# Altium PCB FEU31_Part3.PcbDoc
Units mm, origin at the board's own origin, x right, y up, seen from the top; angles counter-clockwise.
Board outline 29.45 x 22.27 mm, 2 copper layers (Top Layer, Bottom Layer), stack 1.021 mm thick; 57 components, 50 nets, 200 pads, 80 vias.
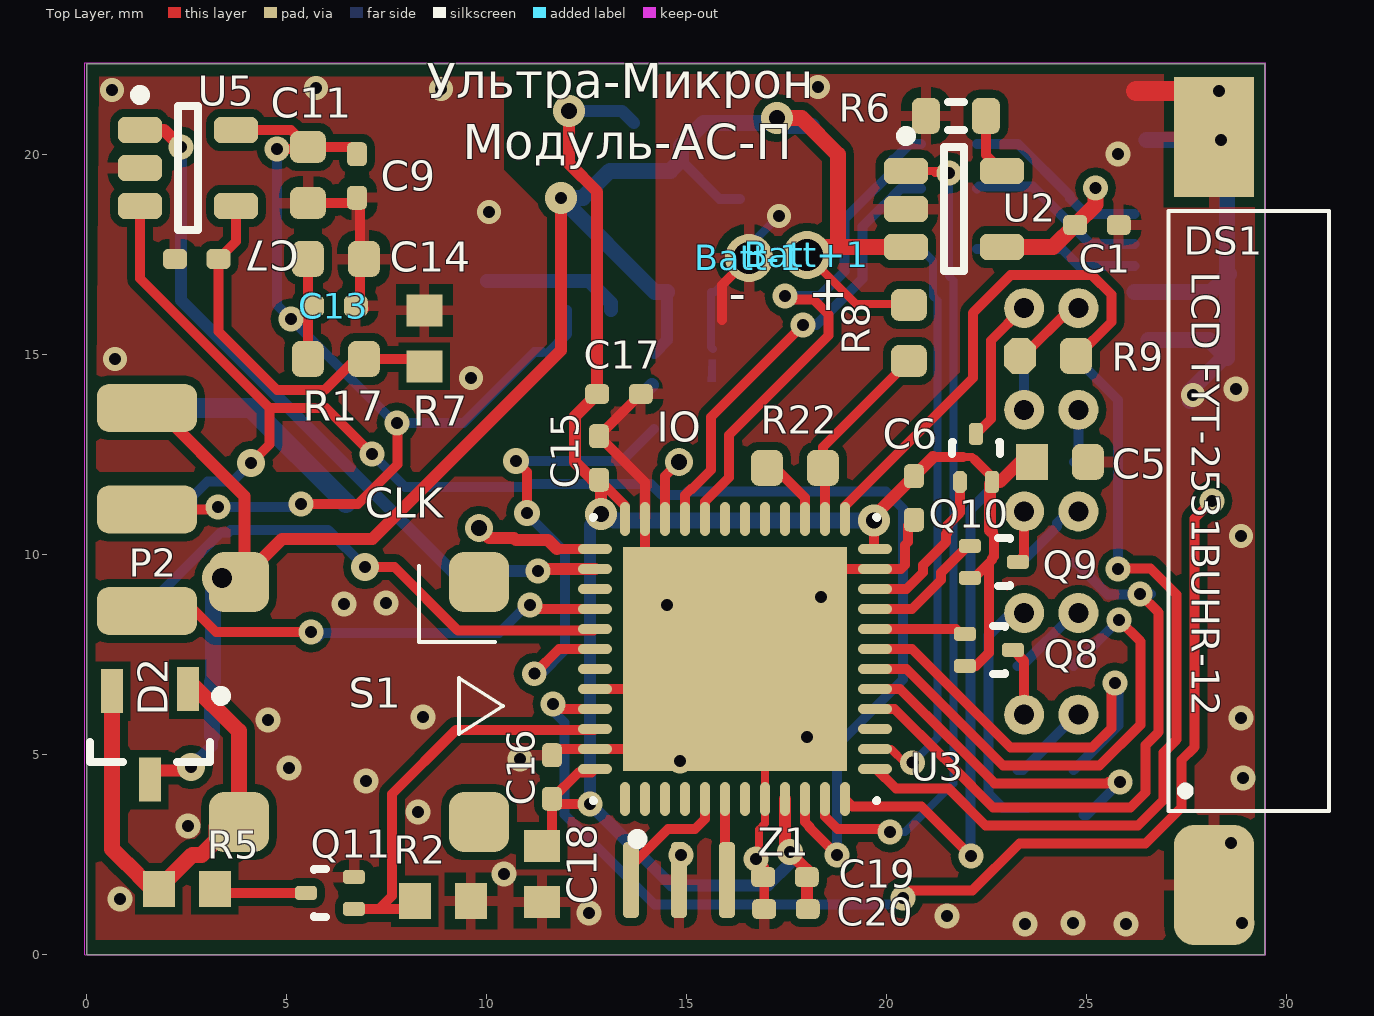
[diagram p0: Top Layer view]
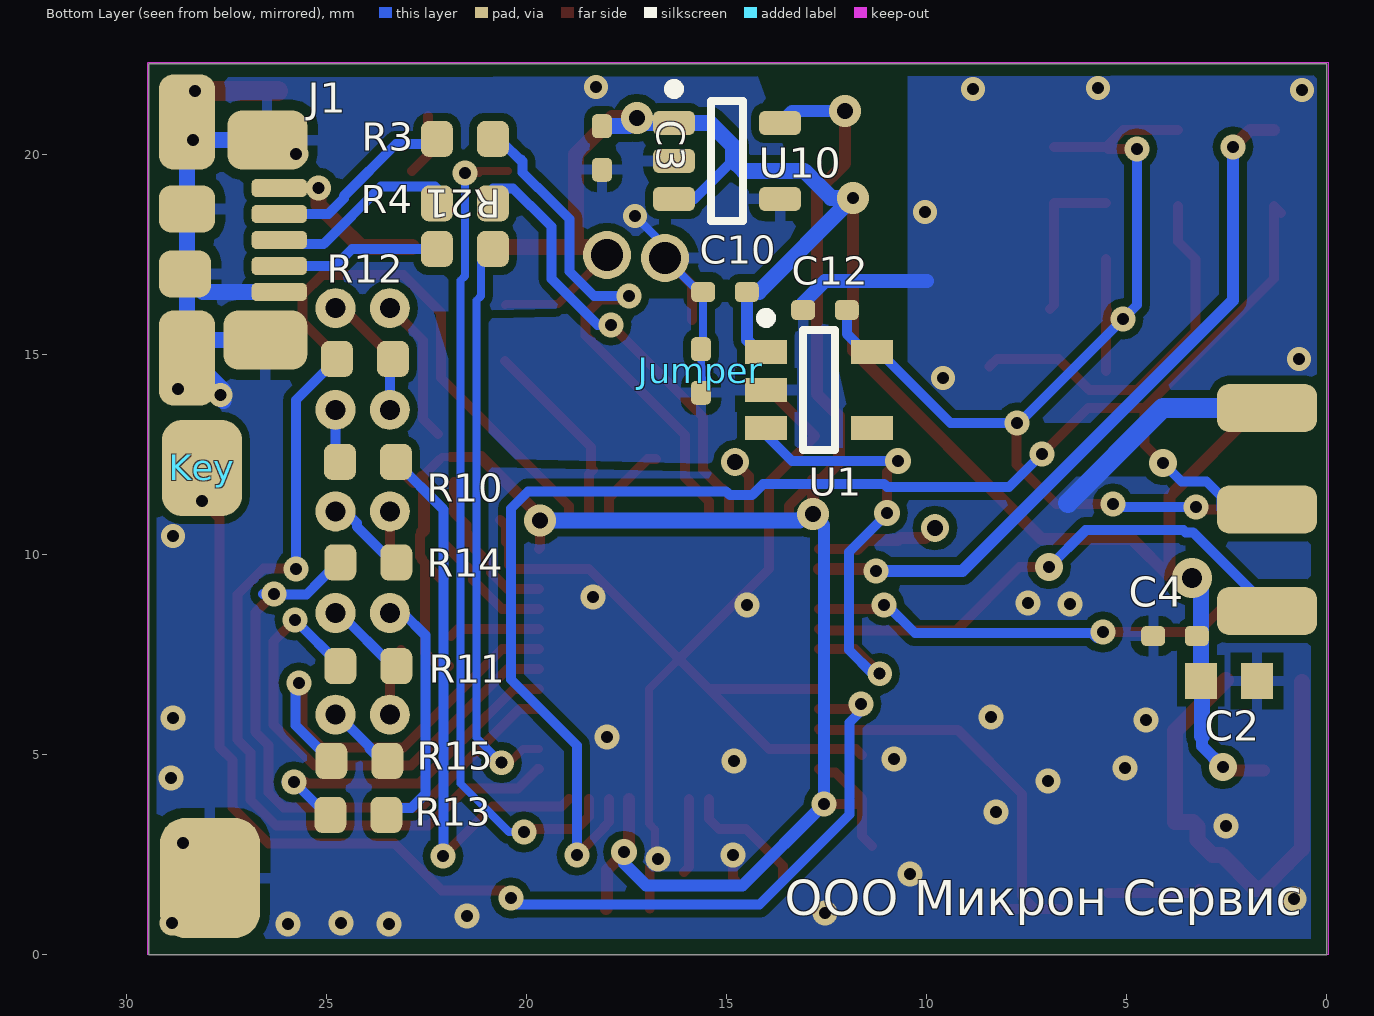
[diagram p1: Bottom Layer view, seen from below]
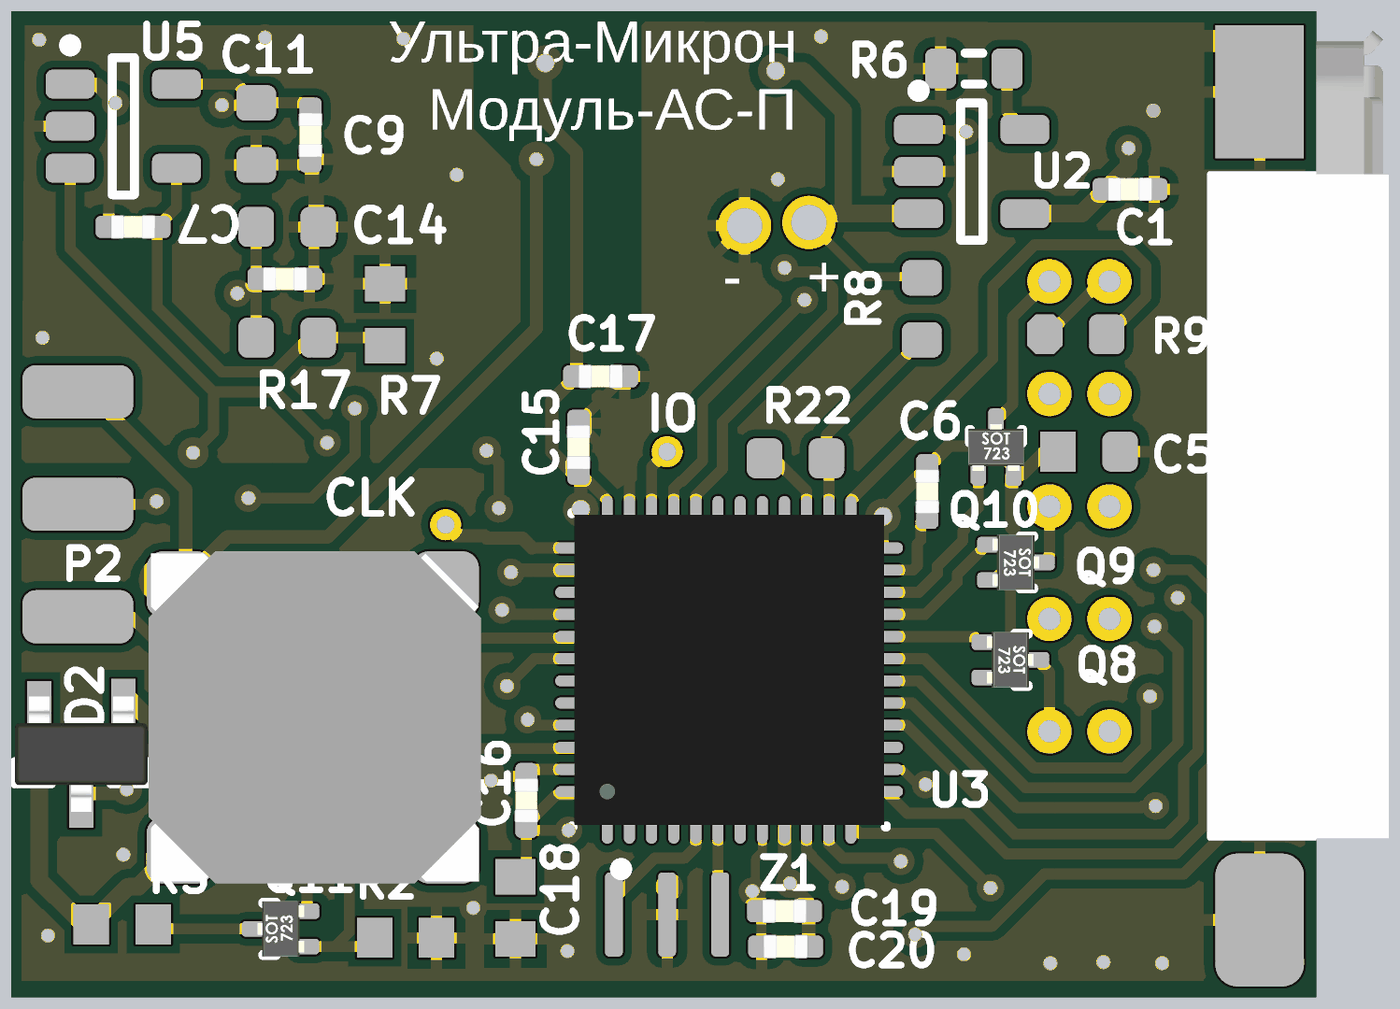
[diagram p2: 3D render of the assembled board from above, using the file's embedded part models]

## Layer stack, top to bottom
Top Solder: solder mask 0.0102, Solder Resist, Dk 3.5
Top Layer: signal copper 0.0356
Dielectric1: dielectric 0.95, FR-4, Dk 4.8
Bottom Layer: signal copper 0.0356
Bottom Solder: solder mask 0.0102, Solder Resist, Dk 3.5

## Board outline
0,0 0,22.275 29.45,22.275 29.45,0

## Design rules (kind name [scope] priority, off if disabled: settings)
Clearance [All] p1: gap=0.2
ComponentClearance [All] p1: gap=0.1 collisioncheckmode=3 verticalgap=0.254 showdistances=TRUE
HoleSize [All] p1: absolutevalues=TRUE maxlimit=2.54 minlimit=0.3 maxpercent=80.000 minpercent=20.000
HoleToHoleClearance [All] p1: gap=0.152 allowstackedmicrovias=TRUE
MinimumAnnularRing [All] p1: minimumring=0.15
MinimumSolderMaskSliver [All] p1: minsoldermaskwidth=0.152
PlaneClearance [All] p1: clearance=2
PlaneConnect [All] p1: planeconnectstyle=Relief reliefexpansion=0.457 reliefentries=4 reliefconductorwidth=0.3 reliefairgap=0.457
PolygonConnect PolygonConnect_via [IsVia] p1: connectstyle=Direct reliefconductorwidth=0.254 reliefentries=4 polygonreliefangle="90 Angle" airgapwidth=0.254
PolygonConnect [All] p2: connectstyle=Relief reliefconductorwidth=0.254 reliefentries=4 polygonreliefangle="90 Angle" airgapwidth=0.254
RoutingVias [All] p1: holewidth=0.3 width=0.62 viastyle="Through Hole" minholewidth=0.3 minwidth=0.62 maxholewidth=6 maxwidth=4
SilkToSilkClearance [All] p1 off: silktosilkclearance=0.152
SilkToSolderMaskClearance SilkscreenOverComponentPads [IsPad] p1: minsilkscreentomaskgap=0.1 clearancetoexposedcopper=TRUE
SolderMaskExpansion [All] p1: expansion=0.05
Width [All] p1: maxlimit=2.254 minlimit=0.2 preferedwidth=0.2 minimp=50.000000 maximp=50.000000 favimp=50.000000
22 further rules are at their usual default settings.

## Components (designator, comment, footprint, x,y, rotation, side; value= is the part's Value field where it differs from the comment)
Batt+1 "" "Sensor contact"#1 18,17.5 r90 top
Batt-1 "" "Sensor contact"#1 16.55,17.425 r90 top
C1 "1uF" "0402 AVX" 25.25,18.25 r270 top
C2 "10uF" 1608[0603]#1 2.45,6.85 r180 bottom
C3 "100nF" "0402 AVX" 18.125,20.175 r180 bottom
C4 "100nF" "0402 AVX" 3.8,7.975 r270 bottom
C5 "10uF" 1608[0603]#2 24.325,12.325 r0 top
C6 "100nF" "0402 AVX" 20.675,11.425 r0 top
C7 "100nF" "0402 AVX" 2.745,17.4 r270 top
C9 "100nF" "0402 AVX" 6.75,19.475 r0 top
C10 "1uF" "0402 AVX" 15.05,16.575 r270 bottom
C11 "10uF" 1608[0603]#3 5.525,19.5 r270 top
C12 "1uF" "0402 AVX" 12.55,16.125 r270 bottom
C13 "100nF" "0402 AVX" 6.175,16.225 r90 top
C14 "10uF" 1608[0603]#3 6.225,17.4 r0 top
C15 "100nF" "0402 AVX" 12.8,12.425 r180 top
C16 "100nF" "0402 AVX" 11.625,4.45 r180 top
C17 "100nF" "0402 AVX" 13.3,14.025 r90 top
C18 "10uF" 1608[0603]#1 11.375,2.025 r270 top
C19 "1uF" "0402 AVX" 17.45,1.95 r270 top
C20 "100nF" "0402 AVX" 17.475,1.15 r270 top
CLK "" "Sensor contact"#2 9.8,10.675 r90 top
D2 "BAR43C" SOT23-3 1.575,5.525 r270 top
DS1 "FYT-2531BUHR-12" FYT-2531BUHR-12 27.786,11.089 r0 top locked
IO "" "Sensor contact"#2 14.8,12.325 r0 top
J1 "Micro-USB" 47346-0001 25.443,17.875 r270 bottom locked
Jumper "" "0402 JUMPER" 15.65,14.6 r0 bottom net-tie
Key "" "Sensor contact"#3 28.125,12.175 r180 top
P2 "Header 3X2" PLS_FLAT_CONN_6 1.5,11.138 r180 top locked
Q8 "RZM002P02T2L" RUM002N05#1 22.55,7.625 r0 top
Q9 "RZM002P02T2L" RUM002N05#1 22.675,9.825 r0 top
Q10 "RZM002P02T2L" RUM002N05#2 22.225,12.425 r90 top
Q11 "RUM002N05T2L" RUM002N05#1 6.075,1.55 r180 top
R2 "10k" 1608[0603]#1 8.898,1.348 r0 top
R3 "22R" 1608[0603]#3 21.55,20.4 r0 bottom
R4 "22R" 1608[0603]#3 21.55,18.787 r0 bottom
R5 "22R" 1608[0603]#1 2.5,1.65 r0 top
R6 "10K" J1-0603 21.725,20.975 r0 top
R7 "22R" 1608[0603]#1 8.434,15.416 r270 top
R8 "10k" 1608[0603]#3 20.55,15.55 r270 top
R9 "270R" 1608[0603]#4 24.025,14.975 r0 top
R10 "270R" 1608[0603]#3 23.975,12.325 r180 bottom
R11 "270R" 1608[0603]#3 23.967,7.22 r0 bottom
R12 "270R" 1608[0603]#3 24.05,14.9 r0 bottom
R13 "270R" 1608[0603]#3 24.217,3.5 r0 bottom
R14 "270R" 1608[0603]#3 23.967,9.815 r0 bottom
R15 "270R" 1608[0603]#3 24.192,4.85 r0 bottom
R17 "10K" 1608[0603]#3 6.225,14.9 r180 top
R21 "22R" 1608[0603]_RES 21.55,17.65 r0 bottom
R22 "10k" 1608[0603]#3 17.7,12.175 r0 top
S1 "CMT-7525S-SMT" CMT-7525S-SMT 6.8,6.325 r180 top
U1 "LP5907MFX-3.0" TPS78330DDCR#1 12.7,14.125 r180 bottom
U2 "MCP73831T-2ACI/OT" SOT-23-OT5_N 21.675,18.65 r0 top
U3 "STM32L152CBU6" UFQFPN48 16.2,7.4 r90 top
U5 "LMV7239M5" MF05A_N 2.525,19.675 r0 top
U10 "TPS78330DDCR" TPS78330DDCR#2 15,19.85 r180 bottom
Z1 "8MHZ_cap" PRQV8.00CR5010Y000 14.8,1.875 r180 top

## Footprints (in the part's own frame and the unit in brackets; to place one, negate y for a bottom-side part, rotate by r counter-clockwise, add the part's x,y. Pads: shape width x height; smd on the part's side, far side on the other; paste and mask are expansions set on the pad)
"0402 AVX" [mm]
  rrect50% 0.5x0.6 smd: 1(0,0.545) 2(0,-0.545)
  body extent -0.26,-0.5 0.27,0.5, height 0.36
"0402 JUMPER" [mm]
  rrect50% 0.5x0.6 smd: 1(0,0.545) 2(0,-0.545)
  Top Layer region: -0.125,0.275 0.075,0.275 0.075,-0.275 -0.1,-0.275
1608[0603]#1 [mm] "Chip Capacitor, Body 1.6x0.8mm, IPC High Density"
  rect 0.8x0.9 smd: 1(-0.7,0) 2(0.7,0)
  body extent -0.87,-0.48 0.87,0.48, height 1.3
1608[0603]#2 [mm] "Chip Capacitor, Body 1.6x0.8mm, IPC High Density"
  rect 0.8x0.9 smd: 1(-0.7,0)
  rrect50% 0.8x0.9 smd: 2(0.7,0)
  body extent -0.87,-0.48 0.87,0.48, height 1.3
1608[0603]#3 [mm] "Chip Capacitor, Body 1.6x0.8mm, IPC High Density"
  rrect50% 0.8x0.9 smd: 1(-0.7,0) 2(0.7,0)
  body extent -0.87,-0.48 0.87,0.48, height 1.3
1608[0603]#4 [mm] "Chip Capacitor, Body 1.6x0.8mm, IPC High Density"
  oct 0.8x0.9 smd: 1(-0.7,0)
  rrect50% 0.8x0.9 smd: 2(0.7,0)
  body extent -0.87,-0.48 0.87,0.48, height 1.3
1608[0603]_RES [mm] "Chip Capacitor, Body 1.6x0.8mm, IPC High Density"
  rrect50% 0.8x0.9 smd: 1(-0.7,0) 2(0.7,0)
  body extent -0.85,-0.45 0.85,0.45, height 0.45
47346-0001 [mm] "Molex Mico-USB"
  rrect50% 0.45x1.38 smd: 1(-1.3,-0.75) 2(-0.65,-0.75) 3(0,-0.75) 4(0.65,-0.75) 5(1.3,-0.75)
  rrect50% 1.475x2 smd: MH1(-2.5,-1.05)
  rrect50% 1.475x2.1 smd: MH2(2.5,-1.1)
  rrect50% 2.375x1.4 smd: MH3(-2.95,-3.057) MH4(2.95,-3.057)
  rrect50% 1.175x1.4 smd: MH3(-0.775,-3.057)
  rrect50% 1.175x1.3 smd: MH4(0.85,-3.107)
  body extent -3.95,-5.52 4.03,-0.09, height 2.77
CMT-7525S-SMT [mm]
  rrect50% 1.5x1.5 smd: 0(-3,3) 1(-3,-3) +(3,-3) -(3,3)
  silkscreen extent -3.6,-3.4 -1.5,0.8, body extent -3.8,-3.75 3.7,3.75, height 2.5
FYT-2531BUHR-12 [mm]
  round 1 hole 0.5: 1(-3,-5.08) 2(-3,-2.54) 3(-3,0) 4(-3,2.54) 5(-3,5.08) 6(-4.356,5.08) 7(-4.356,2.54) 8(-4.356,0) 9(-4.356,-2.54) 10(-4.356,-5.08)
  silkscreen extent -0.74,-7.49 3.26,7.52, body extent -0.7,-7.5 3.3,7.5, height 8
J1-0603 [mm] "Chip Resistor, Body 1.6x0.8mm, IPC High Density"
  rrect50% 0.7x0.9 smd: 1(-0.75,0) 2(0.75,0)
  silkscreen extent -0.2,-0.35 0.2,0.35, body extent -0.85,-0.48 0.85,0.48, height 0.9
MF05A_N [mm] "SOT23, 5-Leads, Body 2.9x1.6mm, Pitch 0.95mm, Lead Span 2.8mm, IPC Medium Density"
  rrect50% 1.1x0.65 smd: 1(-1.2,0.95) 2(-1.2,0) 3(-1.2,-0.95) 4(1.2,-0.95) 5(1.2,0.95)
  silkscreen extent -1.32,-1.55 0.25,1.95, body extent -0.9,-1.55 0.9,1.55, height 1.19
PLS_FLAT_CONN_6 [mm]
  rrect50% 2.5x1.2 smd far side: 1(0,-2.54) 3(0,0) 5(0,2.54)
  rrect50% 2.5x1.2 smd: 2(0,-2.54) 4(0,0) 6(0,2.54)
PRQV8.00CR5010Y000 [mm]
  rrect50% 0.4x1.9 smd: 1(-1.2,0) 2(1.2,0) 3(0,0)
  body extent -1.6,-0.65 1.6,0.65, height 1
RUM002N05#1 [mm] "SOTFL, 3-Leads, Body 1,20x1,20mm, Pitch 0,40mm, IPC Medium Density"
  rrect50% 0.55x0.35 smd: 1(-0.6,0.4) 2(-0.6,-0.4) 3(0.6,0)
  silkscreen extent 0.1,-0.6 0.4,0.6, body extent -0.53,-0.63 0.52,0.63, height 0.45
RUM002N05#2 [mm] "SOTFL, 3-Leads, Body 1,20x1,20mm, Pitch 0,40mm, IPC Medium Density"
  oct 0.55x0.35 smd: 1(-0.6,0.4)
  rrect50% 0.55x0.35 smd: 2(-0.6,-0.4) 3(0.6,0)
  silkscreen extent 0.1,-0.6 0.4,0.6, body extent -0.53,-0.63 0.52,0.63, height 0.45
"Sensor contact"#1 [mm]
  round 1.2 hole 0.8: 1(0,0)
"Sensor contact"#2 [mm]
  round 0.7 hole 0.4: 1(0,0)
"Sensor contact"#3 [mm]
  rrect50% 2x2.4 smd far side: 1(0,0)
SOT23-3 [mm] "SOT23, 3-Leads, Body 2,90x2,45mm, Pitch 0,95mm, IPC Medium Density"
  rect 1.1x0.55 smd: 1(-1.12,0.95) 2(-1.07,-0.95) 3(1.14,0)
  silkscreen extent -1.07,-1.5 0.7,1.9, body extent -1.27,-1.5 1.33,1.5, height 1.1
SOT-23-OT5_N [mm] "SOT23, 5-Leads, Body 2.9x1.6mm, Pitch 0.95mm, Lead Span 2.7mm, IPC Medium Density"
  rrect50% 1.1x0.65 smd: 1(-1.2,0.95) 2(-1.2,0) 3(-1.2,-0.95) 4(1.2,-0.95) 5(1.2,0.95)
  silkscreen extent -1.32,-1.55 0.25,1.95, body extent -0.9,-1.55 0.9,1.55, height 1.45
TPS78330DDCR#1 [mm] "SOT23, 5-Leads, Body 3,0x3,5mm (max), Pitch 0,95mm, IPC Medium Density"
  rect 1.05x0.6 smd: 1(-1.325,0.95) 2(-1.325,0) 3(-1.325,-0.95) 4(1.325,-0.95) 5(1.325,0.95)
  silkscreen extent -1.45,-1.5 0.4,1.92, body extent -0.73,-1.52 0.72,1.53, height 1.1
TPS78330DDCR#2 [mm] "SOT23, 5-Leads, Body 3,0x3,5mm (max), Pitch 0,95mm, IPC Medium Density"
  rrect50% 1.05x0.6 smd: 1(-1.325,0.95) 2(-1.325,0) 3(-1.325,-0.95) 4(1.325,-0.95) 5(1.325,0.95)
  silkscreen extent -1.45,-1.5 0.4,1.92, body extent -0.73,-1.52 0.72,1.53, height 1.1
UFQFPN48 [mm]
  oval 0.85x0.25 smd: 1(-3.5,2.75) 2(-3.5,2.25) 3(-3.5,1.75) 4(-3.5,1.25) 5(-3.5,0.75) 6(-3.5,0.25) 7(-3.5,-0.25) 8(-3.5,-0.75) 9(-3.5,-1.25) 10(-3.5,-1.75) 11(-3.5,-2.25) 12(-3.5,-2.75) 25(3.5,-2.75) 26(3.5,-2.25) 27(3.5,-1.75) 28(3.5,-1.25) 29(3.5,-0.75) 30(3.5,-0.25) 31(3.5,0.25) 32(3.5,0.75) 33(3.5,1.25) 34(3.5,1.75) 35(3.5,2.25) 36(3.5,2.75)
  oval 0.25x0.85 smd: 13(-2.75,-3.5) 14(-2.25,-3.5) 15(-1.75,-3.5) 16(-1.25,-3.5) 17(-0.75,-3.5) 18(-0.25,-3.5) 19(0.25,-3.5) 20(0.75,-3.5) 21(1.25,-3.5) 22(1.75,-3.5) 23(2.25,-3.5) 24(2.75,-3.5) 37(2.75,3.5) 38(2.25,3.5) 39(1.75,3.5) 40(1.25,3.5) 41(0.75,3.5) 42(0.25,3.5) 43(-0.25,3.5) 44(-0.75,3.5) 45(-1.25,3.5) 46(-1.75,3.5) 47(-2.25,3.5) 48(-2.75,3.5)
  rect 5.6x5.6 smd paste-2.5: 49(0,0)
  silkscreen extent -4.62,-3.55 3.55,3.55, body extent -3.51,-3.51 3.51,3.51, height 0.78

## Part data
Batt+1 Batt-1 CLK IO Key: library part Plug, "Plug"
C1 C2 C3 C4 C5 C6 C7 C9 C10 C11 C12 C13 C14 C15 C16 C17 C18 C19 C20: library part "Cap Semi", "Capacitor (Semiconductor SIM Model)"
D2: library part BAT54C, "Schottky Barrier Double Diode"
DS1: library part FYT-2531BUHR-12_1, "7-segment 3x indicator"
J1: library part 0481900001, "USB On-The-Go (OTG) Mini-B Receptacle, Right Angle, SMT, 0.80mm (.031\") Pitch, Solder Tabs with Back Cover, Recessed Type"
Jumper R2 R3 R4 R5 R7 R8 R9 R10 R11 R12 R13 R14 R15 R17 R21 R22: library part "Resistor 0805"
P2: "Header, 3-Pin, Dual row"
Q8 Q9 Q10: library part IRLML6401, "HEXFET Power MOSFET"
Q11: library part IRLML2402, "HEXFET Power MOSFET"
R6: library part Res3, "Resistor"
U1: library part TPS78330DDCR
U2: "Miniature Single-Cell, Fully Integrated Li-Ion, Li-Polymer Charge Management Controller, 4.2V, 5-Pin SOT-23, Industrial Temperature, Tape and Reel"
U5: "45 nsec, Ultra Low Power, Low Voltage, Rail-to-Rail Input Comparator with Open-Drain/Push-Pull Output, 5-pin SOT-23"

## Free pads (board coordinates)
  rrect50% 2x3 smd: 17(28.175,1.75)
  rect 2x3 smd: 17(28.175,20.45)
  rrect50% 2.5x3 smd far side: 18(27.925,1.925)

## Via types
v1: diameter 0.62, hole 0.3, Top Layer to Bottom Layer, tented both sides, 58 vias
v2: diameter 0.6, hole 0.3, Top Layer to Bottom Layer, tented both sides, 10 vias
v3: diameter 0.8, hole 0.4, Top Layer to Bottom Layer, tented both sides, 4 vias
v4: diameter 0.7, hole 0.3, Top Layer to Bottom Layer, tented both sides, 3 vias
v5: diameter 0.65, hole 0.3, Top Layer to Bottom Layer, tented both sides, 3 vias
v6: diameter 1, hole 0.5, Top Layer to Bottom Layer, tented both sides, 1 vias
v7: diameter 0.8, hole 0.3, Top Layer to Bottom Layer, tented both sides, 1 vias

## Nets (pads, with @x,y where several pads share a name; then routed paths per layer and width w, separated by ;. In a path a pad name is that pad's centre, name@x,y a point inside that pad or via, vN(x,y) a via of type N, cw(c..) or ccw(c..) an arc to the next point about the centre after c; other vN are vias at no path point)
6.5MV: C7.1 R7.2 R17.1 U5.4 | length 9.5
  Top Layer w0.25: U5.4 3.725,17.835 C7.1 3.29,15.585 4.75,14.125 5.942,14.125 6.717,14.9 R17.1 8.25,14.9 R7.2
+5: C1.2 J1.1 U2.4 | length 3.2
  Top Layer w0.4: U2.4 24.155,17.7 C1.2 25.216,18.761 v1(25.216,19.175)
+DATA: J1.3 R4.2 | length 4.6
  Bottom Layer w0.25: R4.2@22.25,19.162 22.298,19.21 23.646,19.21 25.081,17.775 J1.3@26.193,17.775
"+DATA ESD": R4.1 U3.33 | length 11.2
  Top Layer w0.25: U3.33 14.95,11.5 15.1,11.65 15.127,11.65 15.6,12.123 15.6,13.45 v1(17.901,15.751)
  Bottom Layer w0.25: v1(17.901,15.751) 18.233,15.751 19.386,16.903 19.386,18.211 19.915,18.74 19.924,18.74 20.347,19.162 R4.1@20.85,19.162
-DATA: J1.2 R3.2 | length 4.7
  Bottom Layer w0.25: R3.2@22.25,20.275 23.275,20.275 24.581,18.969 24.581,18.912 24.968,18.525 J1.2
"-DATA ESD": R3.1 U3.32 | length 13.6
  Top Layer w0.25: U3.32 15.45,11.336 16.05,11.936 16.05,13.002 18.536,15.488 18.536,16.014 18.164,16.386 17.539,16.386 v1(17.45,16.475)
  Bottom Layer w0.25: v1(17.45,16.475) 18.321,16.475 18.936,17.089 18.936,18.402 19.724,19.19 19.738,19.19 20.11,19.562 20.11,19.847 20.154,19.891 20.189,19.891 20.561,20.263 20.561,20.275 R3.1@20.85,20.275
"ADC START EXTI_15": U3.38 U5.1 | length 18.2
  Top Layer w0.3: U5.1 1.925,20.625 v1(2.35,20.2) ; v1(11.275,9.6) 11.325,9.65 U3.38
  Bottom Layer w0.3: v1(2.35,20.2) 2.35,16.367 9.117,9.6 v1(11.275,9.6)
AGND: C7.2 C9.2 C11.2 C12.2 C13.2 C14.2 Jumper.1 R7.1 U1.2 U5.2 | length 7.6
  Top Layer w0.25: C11.2 6.825,18.8 6.825,16.25 C13.2@6.925,16.15
  Bottom Layer w0.35: 10,16.85 12.55,16.85 13.095,16.305 C12.2 ; U1.2@14.03,14.155 U1.2@14.125,14.25
  other v2: 9.6,14.425 0.7,14.9 10.05,18.575 0.625,21.625 8.85,21.65 5.725,21.675
AVCC: C9.1 C11.1 C12.1 C13.1 C14.1 P2.4 R17.2 U1.5 U5.5 | length 28.4
  Top Layer w0.25: P2.4 3.212,11.138 v1(3.275,11.201) ; U5.5 5.1,20.625 C11.1 ; v1(4.75,20.15) 5.475,20.15 C11.1 ; v1(5.35,11.276) 6.774,11.276 7.76,12.262 7.76,13.29 v1(7.75,13.3) ; R17.2@5.525,14.6 R17.2 5.525,16.1 5.5,16.125 5.525,16.15 C14.1 ; C9.1@6.825,20.2 C11.1
  Bottom Layer w0.25: v1(3.275,11.201) v1@5.35,11.201 ; v1(4.75,20.15) 4.75,16.25 v1(5.1,15.9) 7.7,13.3 v1(7.75,13.3) 9.413,13.3 11.188,15.075 U1.5 ; U1.5@11.525,15.05 12.005,15.53 C12.1
BAT: Batt+1.1 C2.1 C3.1 C4.1 C10.1 D2.3 P2.2 R8.1 S1.+ U1.1 U2.3 U10.1 U10.3 | length 49.8
  Top Layer w0.2: Batt+1.1 19.225,16.275 20.525,16.275 R8.1
  Top Layer w0.3: P2.2 1.732,13.678 3.935,11.474 3.935,9.46 4.876,10.401 7.136,10.401 11.85,15.115 v7(11.85,18.925) ; D2.3@1.575,4.61 2.51,4.61 v4(2.6,4.7)
  Top Layer w0.4: v3(17.25,20.925) 17.862,20.925 18.775,20.012 18.775,17.7 ; Batt+1.1 18.2,17.7 18.775,17.7 ; U2.3 18.775,17.7
  Bottom Layer w0.25: 14.85,19.866 15.816,18.9 U10.3
  Bottom Layer w0.3: v4@2.48,4.58 v4(2.6,4.7) 3.129,5.229 3.129,5.473 ; U1.1@14.175,15.05 14.505,15.38 C10.1
  Bottom Layer w0.4: 3.129,5.473 3.129,6.829 C2.1 v6@3.15,9.2 ; C10.1 14.2,16.575 v7(11.85,18.925) 12.397,18.925 13.072,19.6 14.584,19.6 14.85,19.866 14.85,20.225 15.425,20.8 U10.1 17.125,20.8 v3(17.25,20.925) 17.455,20.72 C3.1
  other v6: 3.375,9.425
C_DIG1: Q8.1 U3.20 | length 2.3
  Top Layer w0.25: U3.20 21.725,8.15 Q8.1@21.9,7.975
C_DIG2: Q9.1 U3.21 | length 3.1
  Top Layer w0.25: U3.21 20.623,8.65 21.35,9.377 21.35,9.558 22.017,10.225 Q9.1
C_DIG3: Q10.1 U3.22 | length 4
  Top Layer w0.25: U3.22 20.486,9.15 20.9,9.564 20.9,9.745 21.475,10.32 21.475,10.525 21.517,10.567 21.517,10.75 21.825,11.058 Q10.1
C_SEG_A: R12.2 U3.13 | length 20.7
  Top Layer w0.25: U3.13 19.734,4.65 20.224,4.16 21.544,4.16 22.464,3.24 26.276,3.24 26.911,3.876 26.911,5.058 27.235,5.382 27.235,9.015 26.589,9.66 25.786,9.66 v1(25.776,9.65)
  Bottom Layer w0.25: R12.2 25.776,13.874 v1(25.776,9.65)
C_SEG_B: R13.2 U3.17 | length 8.6
  Top Layer w0.25: U3.17 20.327,6.65 21.592,5.385 21.601,5.385 22.685,4.301 22.685,4.292 22.696,4.304 22.716,4.284 25.501,4.284 25.542,4.325 v1(25.826,4.325)
  Bottom Layer w0.25: R13.2 25.001,3.5 v1(25.826,4.325) v1@26.017,4.325
C_SEG_C: R11.2 U3.18 | length 12.5
  Top Layer w0.25: U3.18 20.486,7.15 22.902,4.734 25.314,4.734 26.335,5.755 26.335,7.842 v1(25.801,8.375)
  Bottom Layer w0.25: R11.2 24.667,7.242 v1(25.801,8.375)
C_SEG_D: R14.2 U3.16 | length 15.5
  Top Layer w0.25: U3.16 20.191,6.15 21.406,4.935 21.414,4.935 21.625,4.725 21.625,4.716 22.651,3.69 26.089,3.69 26.461,4.062 26.461,5.245 26.785,5.568 26.785,8.567 v1(26.326,9.025)
  Bottom Layer w0.25: R14.2 24.714,9.815 24.765,9.763 25.155,9.374 25.513,9.015 26.316,9.015 v1(26.326,9.025) v1@26.599,9.025
C_SEG_E: R10.2 U3.12 | length 14.2
  Top Layer w0.25: U3.12 19.14,3.71 20.865,3.71 v1(22.1,2.475)
  Bottom Layer w0.25: v1@22.226,2.532 22.169,2.475 v1(22.1,2.475) 22.092,2.483 22.092,5.659 22.092,11.142 R10.2
C_SEG_F: R15.2 U3.19 | length 11
  Top Layer w0.25: U3.19 20.623,7.65 23.089,5.184 25.128,5.184 25.611,5.667 25.611,6.711 v1(25.7,6.8)
  Bottom Layer w0.25: R15.2@24.667,4.625 R15.2 25.784,5.741 25.784,6.716 v1(25.7,6.8)
C_SEG_G: R9.2 U3.25 | length 12.5
  Top Layer w0.25: U3.25 18.95,11.225 22.15,14.425 22.15,16.055 23.089,16.994 25.128,16.994 25.611,16.511 25.611,15.827 24.759,14.975 R9.2
"CHARGE DETECT": U2.1 U3.11 | length 21.1
  Top Layer w0.2: U2.1 21.498,19.6 v1(21.55,19.548) 21.204,19.548
  Top Layer w0.25: U3.11 18.45,3.461 18.761,3.15 20.001,3.15 v1(20.076,3.075)
  Bottom Layer w0.2: v1(20.076,3.075) 20.45,3.075 21.667,4.292 21.667,16.858 21.55,16.975 21.55,17.667 ; 21.55,17.682 v1(21.55,19.548)
CLK: CLK.1 U3.37 | length 3.1
  Top Layer w0.25: 11.75,10.15 U3.37
  Top Layer w0.3: CLK.1 10.05,10.425 10.671,10.425 10.721,10.376 11.524,10.376 11.75,10.15
DAC_OUT: R21.1 U3.14 | length 14.4
  Top Layer w0.2: U3.14 20.101,5.15 20.443,4.808 v1(20.635,4.808)
  Bottom Layer w0.2: v1(20.635,4.808) 21.267,5.44 21.267,16.358 21.15,16.475 21.15,17.35 R21.1
GND: Batt-1.1 C1.1 C2.2 C3.2 C4.2 C5.2 C6.2 C10.2 C15.2 C16.2 C17.2 C18.2 C19.2 C20.2 J1.5 J1.MH1 J1.MH2 J1.MH3 J1.MH4 Jumper.2 P2.1 pad.17 pad.18 Q11.2 R2.2 R6.1 U2.2 U3.8 U3.23 U3.35 U3.44 U3.47 U3.49 U10.2 U10.4 Z1.3 | length 60.1
  Top Layer w0.2: U3.49 16.95,6.65 U3.8 16.95,3.286 16.796,3.132 16.796,2.33 v1@16.816,2.31
  Top Layer w0.23: v1(16.726,2.4) v1@16.796,2.33 ; v1@16.816,2.31 16.93,2.196 C20.2
  Top Layer w0.25: C16.2 11.78,5.15 U3.47 13.95,5.15 U3.49@15.45,6.65 ; U3.44 U3.49@15.45,6.65 ; C17.2 12.8,12.98 C15.2 13.95,11.82 U3.35 13.95,9.65 U3.49 ; Z1.3 14.851,1.926 v1(14.851,2.5) ; v1(14.826,4.85) U3.49@14.826,4.999 ; 15.875,15.875 15.875,16.75 Batt-1.1 Batt-1.1@16.35,17.425 ; C6.2 20.526,10.731 20.526,10.327 20.45,10.251 20.45,9.75 20.35,9.65 U3.23 18.45,9.65 U3.49 ; U3.49@15.45,6.65 U3.49
  Top Layer w0.5: 26.225,21.6 v1(28.3,21.6)
  Bottom Layer w0.2: Jumper.2 15.595,15.2 C10.2 15.7,16.575 Batt-1.1 16.55,17.725 v2(17.3,18.475)
  Bottom Layer w0.23: v1(16.726,2.4) v1@16.876,2.25
  Bottom Layer w0.25: v1(14.826,4.85) 14.8,4.825 v1@14.851,4.774 ; pad.18 pad.18@28.25,2.25
  Bottom Layer w0.4: J1.5 28.1,16.575 J1.MH4@28.5,16.975 ; J1.MH1 28.05,20.375 28.5,20.825 28.5,18.65 J1.MH4@28.5,16.975 ; J1.MH2 28.05,15.375 J1.MH4@28.5,14.925 ; v2@27.581,13.852 27.581,14.104 28.402,14.925 J1.MH4@28.5,14.925 ; J1.MH4@28.55,17.025 J1.MH4@28.5,16.975 ; J1.MH4@28.5,14.925 J1.MH4@28.5,16.975
  Bottom Layer w0.5: P2.1 4.098,13.678 6.475,11.3
  other v1: 23.45,0.775 25.975,0.775 24.65,0.8 28.875,0.8 21.5,0.975 12.55,1.05 0.825,1.4 10.425,2.025 28.6,2.8 2.525,3.225 8.275,3.575 6.975,4.35 28.9,4.425 5.05,4.675 10.825,4.9 18,5.45 4.525,5.875 28.85,5.925 8.4,5.95 14.5,8.75 6.425,8.775 7.475,8.8 18.35,8.95 28.725,14.15 25.775,20.025 28.352,20.373
  other v2: 28.85,10.475 27.656,14.002 18.275,21.7
IO: IO.1 U3.34 | length 1.6
  Top Layer w0.25: U3.34 14.45,11.975 IO.1
KEY: Key.1 U3.45 | length 29.4
  Top Layer w0.25: v1(11.651,6.275) 11.625,6.25 11.725,6.15 U3.45 ; v1(20.4,1.425) 20.585,1.61 22.133,1.61 23.313,2.79 26.462,2.79 27.361,3.689 27.361,4.872 27.685,5.196 27.685,10.91 v1(28.125,11.35)
  Bottom Layer w0.25: v1(11.651,6.275) 11.651,6.099 11.94,5.81 11.94,3.512 14.187,1.265 20.24,1.265 v1(20.4,1.425)
NetD2_1: D2.1 D2.2 R5.1 S1.- | length 12.7
  Top Layer w0.4: D2.2@0.625,6.82 D2.2 0.625,2.65 0.988,2.287 0.992,2.287 1.56,1.719 1.56,1.715 1.625,1.65 R5.1 1.8,1.666 2.634,2.5 2.864,2.5 3.24,2.876 3.24,3.215 3.35,3.325 S1.- 3.8,5.595 D2.1@2.525,6.87
NetDS1_1: DS1.1 R15.1 | length 2.1
  Bottom Layer w0.25: R15.1@23.267,4.625 23.402,4.625 23.942,5.165 23.942,5.21 24.742,6.009 DS1.1
NetDS1_2: DS1.2 R11.1 | length 2.1
  Bottom Layer w0.25: R11.1 23.358,7.22 24.687,8.549 DS1.2
NetDS1_3: DS1.3 R14.1 | length 2.1
  Bottom Layer w0.25: R14.1 23.358,9.815 24.255,10.713 24.255,10.803 24.541,11.089 DS1.3
NetDS1_4: DS1.4 R10.1 | length 1.5
  Top Layer w0.25: DS1.4@24.654,13.629 DS1.4
  Bottom Layer w0.25: R10.1 24.786,12.436 DS1.4
NetDS1_5: DS1.5 R9.1 | length 2
  Top Layer w0.25: R9.1 23.403,14.975 24.597,16.169 DS1.5
NetDS1_6: DS1.6 Q10.3 | length 3.7
  Top Layer w0.25: Q10.3 22.6,13.4 22.6,15.36 23.409,16.169 DS1.6
NetDS1_7: DS1.7 R12.1 | length 1.3
  Bottom Layer w0.25: R12.1 23.43,14.82 DS1.7
NetDS1_8: DS1.8 Q9.3 | length 1.3
  Top Layer w0.25: Q9.3 23.43,9.98 DS1.8
NetDS1_9: DS1.9 R13.1 | length 6.2
  Bottom Layer w0.25: DS1.9 23.096,8.549 22.542,7.995 22.542,5.845 22.542,4.025 22.892,3.675 R13.1@23.517,3.675
NetDS1_10: DS1.10 Q8.3 | length 1.7
  Top Layer w0.25: Q8.3 23.43,7.345 DS1.10
NetQ11_3: Q11.3 R5.2 | length 2.3
  Top Layer w0.25: R5.2 3.3,1.55 Q11.3
NetR6_2: R6.2 U2.5 | length 1.5
  Top Layer w0.25: R6.2 22.475,20 U2.5
NetR8_2: R8.2 R22.2 U3.26 | length 4.8
  Top Layer w0.25: R22.2@18.35,12.125 18.45,12.025 U3.26 ; R22.2 18.4,12.7 R8.2
NetR22_1: R22.1 U3.27 | length 2.1
  Top Layer w0.25: R22.1@16.775,12.4 16.983,12.4 17.95,11.433 U3.27
NetU3_5: U3.5 Z1.2 | length 3.2
  Top Layer w0.25: Z1.2 13.6,2.226 14.524,3.15 15.2,3.15 15.45,3.4 U3.5
NetU3_6: U3.6 Z1.1 | length 1.9
  Top Layer w0.25: U3.6 15.95,2.2 Z1.1@16.075,2.075
PULSE: P2.5 U3.41 | length 13.2
  Top Layer w0.25: v4(6.95,9.7) 7.685,9.7 9.27,8.115 12.665,8.115 U3.41
  Bottom Layer w0.25: P2.5 1.5,8.717 3.349,10.566 3.538,10.566 3.593,10.62 6.031,10.62 v4(6.95,9.7)
PW_ON: U1.3 U3.42 | length 11.9
  Top Layer w0.25: v5(10.726,12.351) 11.001,12.076 v5(11.001,11.051) ; v5@10.8,12.351 v5@10.8,12.432 ; v1(11.183,7.033) 11.8,7.65 U3.42
  Bottom Layer w0.25: v5(10.726,12.351) 13.376,12.351 U1.3@14.175,13.15 ; v5@11,11.025 11.95,10.075 11.95,7.625 11.358,7.033 v1(11.183,7.033) ; v5@11.001,11.026 v5(11.001,11.051)
SIGIN: P2.3 U3.10 U5.3 | length 39.6
  Top Layer w0.25: U5.3@1.15,18.55 U5.3 1.325,16.914 4.564,13.675 ; v4(4.1,12.301) 4.564,12.764 4.564,13.675 ; v1(7.125,12.525) 5.975,13.675 4.564,13.675 ; U3.10 17.95,3.325 18.061,3.214 18.061,3.19 v1(18.751,2.5)
  Bottom Layer w0.25: P2.3 2.64,11.138 2.64,11.464 3.012,11.836 3.636,11.836 v4(4.1,12.301) ; v1(7.125,12.525) 7.949,11.701 10.995,11.701 11.069,11.775 14.095,11.775 14.37,11.5 14.93,11.5 15.019,11.589 19.975,11.589 20.401,11.164 20.401,6.886 18.751,5.236 v1(18.751,2.5)
SOUND: Q11.1 R2.1 U3.46 | length 10.4
  Top Layer w0.25: Q11.1 7.3,1.15 ; R2.1 8,1.15 7.3,1.15 ; U3.46 12.67,5.62 9.22,5.62 7.625,4.025 7.625,1.475 7.3,1.15
USB_SIG_OUT: J1.4 R21.2 | length 4.1
  Bottom Layer w0.25: R21.2 24.375,17.65 24.8,17.225 J1.4
VCC: C5.1 C6.1 C15.1 C16.1 C17.1 C18.1 C19.1 C20.1 Q8.2 Q9.2 Q10.2 U3.9 U3.24 U3.36 U3.48 U10.5 | length 52.6
  Top Layer w0.2: 21.906,12.45 22.125,12.45 22.2,12.375
  Top Layer w0.25: C18.1 11.625,2.975 C16.1 ; v1(12.575,3.775) 11.755,3.775 C16.1 ; U3.48 12.615,4.565 12.285,4.565 C16.1 ; C15.1@12.851,11.829 13.45,11.23 U3.36 ; v3(19.675,10.864) 19.675,10.175 U3.24 ; 21.155,12.45 21.906,12.45 ; Q8.2 22.22,7.225 22.55,7.555 22.55,7.767 22.55,9.8 ; Q9.2 22.175,9.425 22.55,9.8 ; 22.2,12.375 Q10.2@22.625,11.95 ; 22.625,10.569 22.625,10.533 22.675,10.483 22.675,9.967 22.625,9.917 22.625,9.875 22.55,9.8
  Top Layer w0.3: v3(12.05,21.1) 12.05,19.786 12.755,19.081 C17.1 12.2,13.47 12.2,12.32 12.64,11.88 C15.1 ; v3(12.851,11.026) 12.851,11.829 C15.1@12.851,11.88 ; v5@17.45,2.575 U3.9 ; v5(17.576,2.575) 17.576,2.55 17.995,2.131 C19.1 17.995,1.175 C20.1 ; v3(19.675,10.864) 19.675,10.97 C6.1 21.155,12.45 ; 22.625,10.569 22.58,10.613 22.58,11.78 Q10.2 ; Q10.2@22.625,11.95 Q10.2 ; C5.1@23.375,12.375 22.825,11.825 Q10.2
  Bottom Layer w0.3: v3(12.05,21.1) 13.375,21.1 U10.5 ; v3(12.851,11.026) 12.575,10.75 v1(12.575,3.775) 14.61,1.74 17.023,1.74 17.576,2.293 v5(17.576,2.575)
  Bottom Layer w0.4: v3@12.85,11.175 12.871,11.175 13.182,10.864 v3(19.675,10.864)
VSENS: P2.6 U3.40 | length 11.9
  Top Layer w0.25: P2.6 2.703,8.598 3.225,8.075 v1(5.6,8.075) ; v1(11.076,8.75) 11.176,8.65 U3.40
  Bottom Layer w0.25: v1(5.6,8.075) 5.754,7.922 5.883,8.05 10.303,8.05 11.003,8.75 v1(11.076,8.75)
pads on no net: S1.0 S1.1 U1.4 U3.1 U3.2 U3.3 U3.4 U3.7 U3.15 U3.28 U3.29 U3.30 U3.31 U3.39 U3.43

## Polygon pours and split planes (outlines as drawn)
AGND on Top Layer "Top Layer-No Net" (solid, pour order 28): 0.302,21.95 10.425,21.95 10.425,19.625 11.95,18.1 11.95,14.6 9.425,12.075 0.225,12.075
GND on Top Layer "Top Layer-No Net" (solid, pour order 22): 14.225,22.036 14.225,14.8 11.55,12.125 11.375,11.95 0.225,11.95 0.225,0.375 29.2,0.375 29.2,22.011
AGND on Bottom Layer "Top Layer-No Net" (solid, pour order 30): 12.65,16.525 12.775,16.4 22.185,16.4 22.185,14.285 20.625,12.725 18.65,10.75 14.888,10.75 12.95,10.75 11.625,12.075
AGND on Bottom Layer "Top Layer-No Net" (solid, pour order 26): 10.475,21.967 10.475,14.625 9.15,13.3 0.25,13.3 0.25,21.991
GND on Bottom Layer "Top Layer-No Net" (solid, pour order 24): 14.225,21.966 13.05,18.7 14.225,16.265 22.343,16.09 21.125,12.203 9.245,11.95 0.4,11.95 0.4,0.4 29.25,0.4 29.25,21.941

## Keep-outs
Keep-Out Layer:
  lines w0.01: -0.05,0 29.45,0 29.475,0 29.475,22.3 29.45,22.3 -0.05,22.3 -0.05,0

## Silkscreen, mask and mechanical layers (free items; w line width, h text height)
Top Overlay:
  text "Ультра-Микрон" at 8.5,21.125 h1.5
  text "Модуль-АС-П" at 9.4,19.6 h1.5
  text "-    +" at 16.05,15.825 h1.5
Bottom Overlay:
  text "ООО Микрон Сервис" at 13.55,0.7 h1.5

## Text inside footprints (layer, text, board x,y; h text height)
DS1: Top Overlay "LCD FYT-2531BUHR-12" at 27.387,17.083 h1.2 r270